# Altium PCB [2] Main.PcbDoc
Units mil, origin at the board's own origin, x right, y up, seen from the top; angles counter-clockwise.
Board outline 3645.67 x 2242.77 mil, 2 copper layers (Top Layer, Bottom Layer); 66 components, 56 nets, 236 pads, 500 vias.
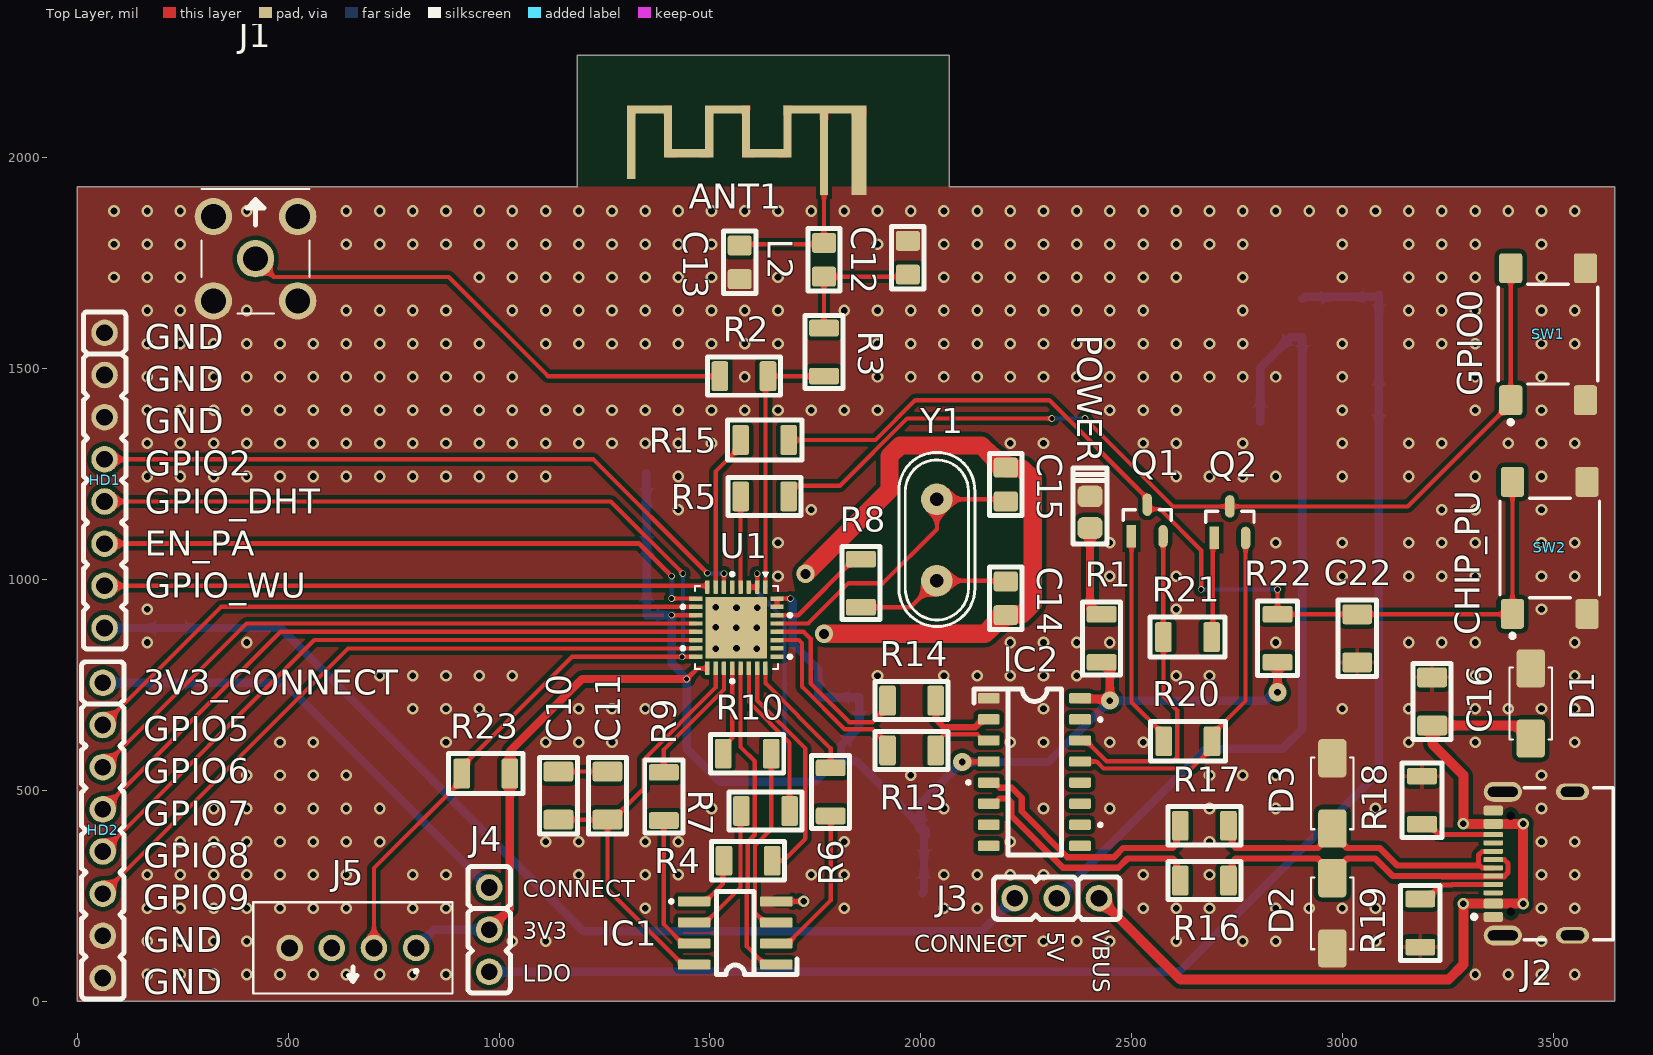
[diagram p0: Top Layer view]
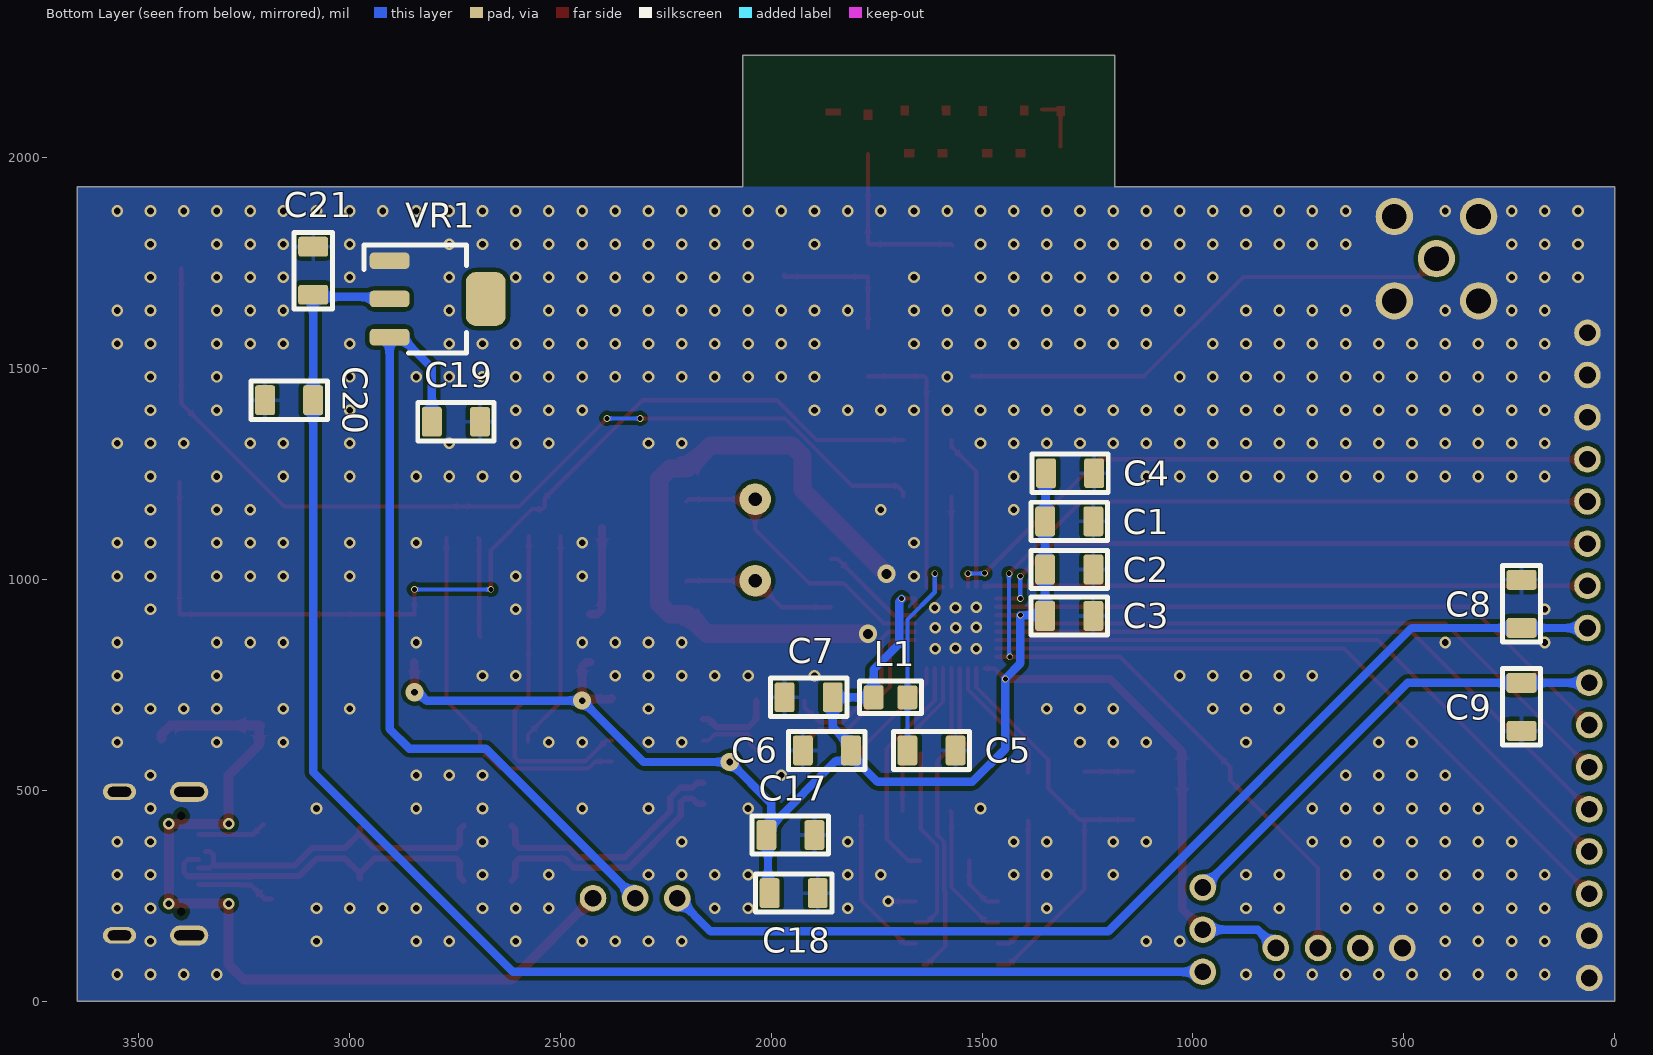
[diagram p1: Bottom Layer view, seen from below]
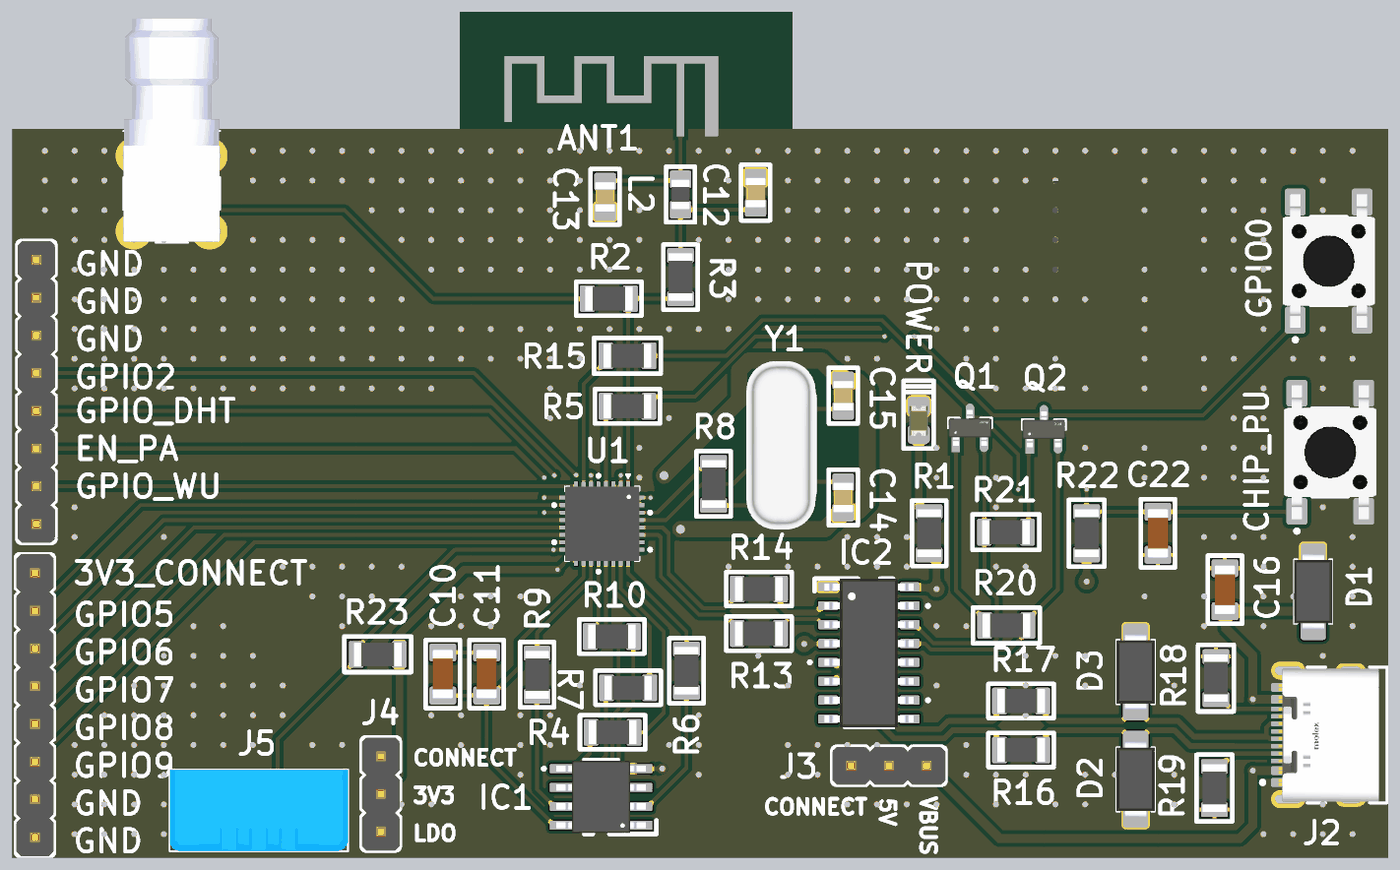
[diagram p2: 3D render of the assembled board from above, using the file's embedded part models]
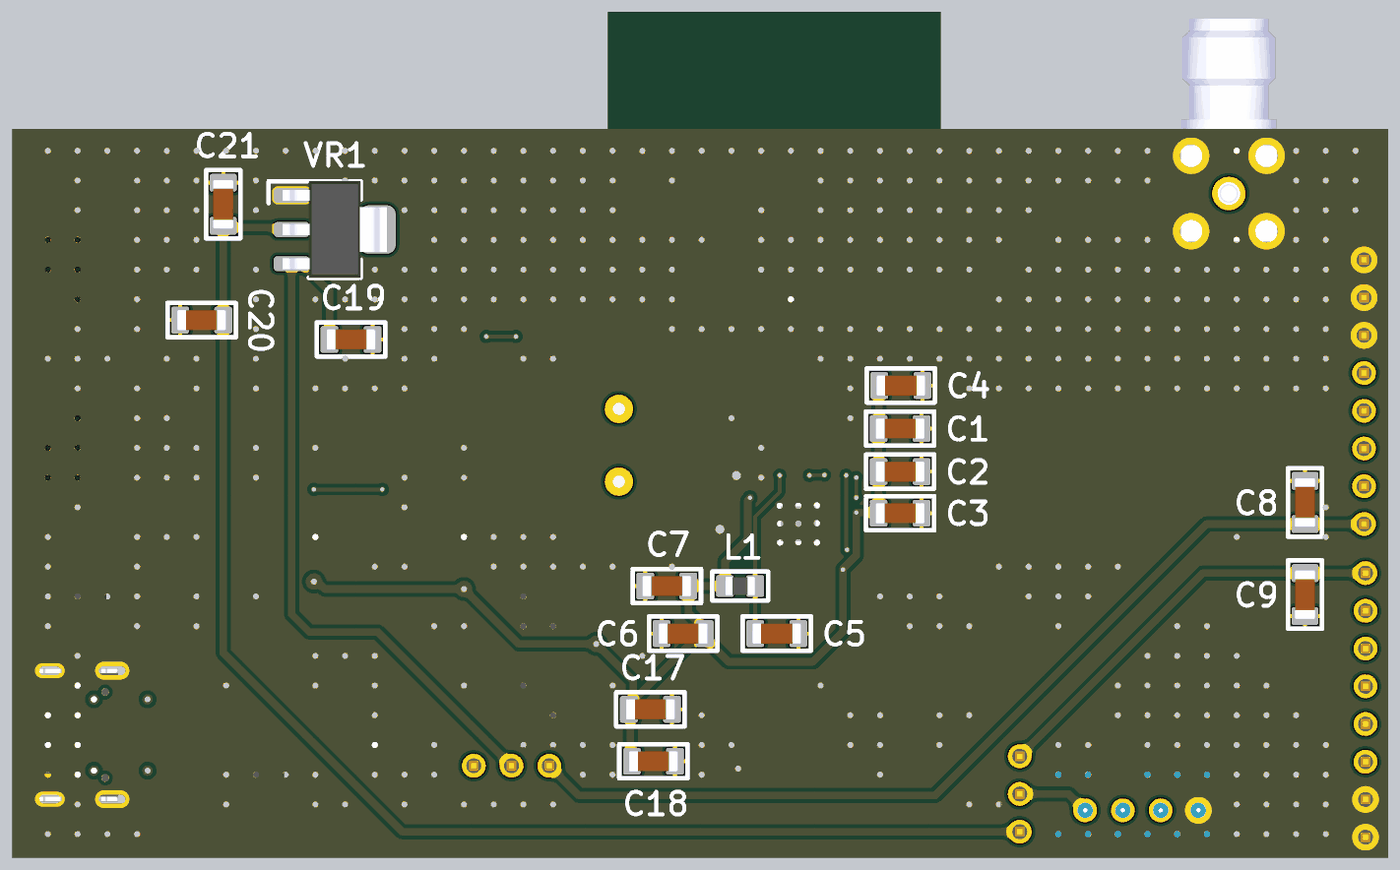
[diagram p3: 3D render of the assembled board from below, using the file's embedded part models]

## Layer stack, top to bottom
Top Solder: solder mask 0.4, Solder Resist, Dk 3.5
Top Layer: signal copper 1.4
Dielectric 1: dielectric 12.6, FR-4, Dk 4.8
Bottom Layer: signal copper 1.4
Bottom Solder: solder mask 0.4, Solder Resist, Dk 3.5

## Board outline
1185.91,2242.77 1185.91,1931.41 0,1931.41 0,0 3645.67,0 3645.67,1931.41 2067.72,1931.41 2067.72,2242.77

## Design rules (kind name [scope] priority, off if disabled: settings)
Clearance [All] p1: gap=10 ignorepadtopadclearanceinfootprint=FALSE
DiffPairsRouting [All] p1: maxlimit=10 minlimit=10 mostfreqgap=10 toplayer_minwidth=15 toplayer_maxwidth=15 toplayer_prefwidth=15 bottomlayer_minwidth=15 bottomlayer_maxwidth=15 bottomlayer_prefwidth=15 maxuncoupledlength=500
PolygonConnect PolygonConnect_1 [All vs IsNamedPolygon('NONET_L-01_P-001') Or IsNamedPolygon('NONET_L-01_P-001')] p1: connectstyle=Direct reliefconductorwidth=10 reliefentries=4 polygonreliefangle="90 Angle" airgapwidth=10
PolygonConnect [All] p2: connectstyle=Relief reliefconductorwidth=10 reliefentries=4 polygonreliefangle="90 Angle" airgapwidth=10
RoutingVias [All] p1: holewidth=15.75 width=27.56 viastyle="Through Hole" minholewidth=11.81 minwidth=15.75 maxholewidth=23.62 maxwidth=43.31
SolderMaskExpansion [All] p1: expansion=4 istentingtop=FALSE
SupplyNets "Schematic Supply Nets_6" [InNet('+3V3_LDO')] p1: voltage=0.000
SupplyNets "Schematic Supply Nets_5" [InNet('+5V_CONNECTOR')] p2: voltage=0.000
SupplyNets "Schematic Supply Nets_4" [InNet('+3V3_CONNECTOR')] p3: voltage=0.000
SupplyNets "Schematic Supply Nets_3" [InNet('+5V_VBUS')] p4: voltage=0.000
SupplyNets "Schematic Supply Nets_2" [InNet('GND')] p5: voltage=0.000
SupplyNets "Schematic Supply Nets_1" [InNet('+5V')] p6: voltage=0.000
SupplyNets "Schematic Supply Nets" [InNet('+3V3')] p7: voltage=0.000
Width [All] p1: maxlimit=3937.01 minlimit=3.94 preferedwidth=21.05 impedanceprofiledriven=TRUE impedanceprofileid={BD9E7770-F0A8-4C08-9988-2C7F983D9492} impedanceprofilevalue=50.000000 minimp=50.000000 maximp=50.000000 favimp=50.000000
29 further rules are at their usual default settings.

## Classes and differential pairs
differential pair class DIFF90: CH340_USB CON_USB USB_D
differential pair CON_USB: +CON_USB_P -CON_USB_N
differential pair CH340_USB: +CH340_USB_P -CH340_USB_N

## Components (designator, comment, footprint, x,y, rotation, side; value= is the part's Value field where it differs from the comment)
ANT1 "ANTENNA" ANT_IFA_USB_2_4GHZ_50R 1853.15,1911.85 r180 top
C1 "10u" 1206_CAP#1 1291.34,1137.8 r0 bottom
C2 "100n" 1206_CAP#1 1291.34,1023.62 r0 bottom
C3 "100n" 1206_CAP#1 1291.34,913.39 r0 bottom
C4 "100n" 1206_CAP#2 1291.34,1251.97 r0 bottom
C5 "1u" 1206_CAP#2 1620.08,594.49 r0 bottom
C6 "100n" 1206_CAP#3 1866.14,594.49 r180 bottom
C7 "10u" 1206_CAP#3 1909.45,720.47 r180 bottom
C8 "100n" 1206_CAP#1 220.47,940 r90 bottom
C9 "100n" 1206_CAP#2 220.47,697.68 r270 bottom
C10 "1u" 1206_CAP#2 1140.75,487.2 r270 top
C11 "100n" 1206_CAP#2 1256.89,487.2 r270 top
C12 "3p3" 0805_CAP 1969.45,1763.15 r270 top
C13 "3p3" 0805_CAP 1570.71,1752.13 r90 top
C14 "15p" 0805_CAP 2201.77,955.2 r90 top
C15 "15p" 0805_CAP 2201.77,1225.08 r270 top
C16 "100n" 1206_CAP#2 3212.91,710.63 r90 top
C17 "10n" 1206_CAP#1 1952.76,393.7 r0 bottom
C18 "100n" 1206_CAP#1 1944.88,255.91 r0 bottom
C19 "4u7, 16V" 1206_CAP#2 2748.03,1374.02 r0 bottom value=4.7uF
C20 "10u" 1206_CAP#2 3143.7,1425.2 r180 bottom
C21 "100n" 1206_CAP#2 3086.61,1732.28 r270 bottom
C22 "1u" 1206_CAP#2 3035.43,860.24 r270 top
D1 "SMAJ5.0A" SMAJ5.0A 3446.85,705.71 r270 top
D2 "SMAJ5.0A" SMAJ5.0A 2976.38,208.07 r90 top
D3 "SMAJ5.0A" SMAJ5.0A 2976.38,492.72 r270 top
HD1 "HD8" Header_8 64.17,1234.88 r270 top
HD2 "HD8" Header_8 60.24,404.76 r270 top
IC1 "W25Q16DVSNIG" W25Q16DVSNIG 1559.06,164.37 r90 top
IC2 "CH340C" CH340C 2269.68,543.11 r270 top
J1 "85_SMA-50-0-144/111_YE" SMA 422.33,1760.77 r180 top
J2 "USB" USB 3492.91,325.67 r90 top (schematic designator j2)
J3 "FTS-103-01-F-S" Header_3 2322.83,244.09 r180 top
J4 "FTS-103-01-F-S" Header_3 976.38,169.29 r270 top
J5 "DHT11" DHT11 653.15,125.98 r180 top
L1 "2.2n" 0805_INDUCTOR 1717.17,720.47 r0 bottom
L2 "2.2n" 0805_INDUCTOR 1770.71,1758.15 r90 top
POWER "LED-0805GVC" "Led 0805G" 2401.57,1159.45 r90 top value=Green (schematic designator LED1)
Q1 "SS8050" SS8050 2537.4,1139.79 r90 top
Q2 "SS8050" SS8050 2733.27,1135.85 r90 top
R1 "1K" RES_0R0_1206#1 2429.13,860.24 r270 top
R2 "0R" RES_0R0_1206#1 1580.71,1482.13 r180 top
R3 "0R" RES_0R0_1206#1 1770.71,1539.22 r90 top
R4 "0R" RES_0R0_1206#1 1590.55,332.68 r0 top
R5 "22R" RES_0R0_1206#1 1629.84,1196.85 r0 top
R6 "0R" RES_0R0_1206#1 1786.42,496.06 r90 top
R7 "0R" RES_0R0_1206#1 1631.89,450.79 r0 top
R8 "22R" RES_0R0_1206#1 1858.27,991.14 r270 top
R9 "0R" RES_0R0_1206#1 1390.75,485.24 r90 top
R10 "0R" RES_0R0_1206#2 1586.61,586.61 r180 top
R13 "499" RES_0R0_1206#1 1978.35,594.49 r0 top
R14 "0R" RES_0R0_1206#1 1978.35,712.6 r0 top
R15 "0R" RES_0R0_1206#1 1629.84,1330.71 r0 top
R16 "0R" RES_0R0_1206#1 2672.91,285.67 r0 top
R17 "0R" RES_0R0_1206#1 2672.91,415.67 r0 top
R18 "5.1K" RES_0R0_1206#1 3188.98,476.38 r270 top
R19 "5.1K" RES_0R0_1206#1 3185.04,185.04 r90 top
R20 "10k" RES_0R0_1206#1 2633.86,616.14 r0 top
R21 "10k" RES_0R0_1206#1 2632.87,863.19 r180 top
R22 "10k" RES_0R0_1206#1 2846.46,860.24 r90 top
R23 "5.1k" RES_0R0_1206#1 968.5,539.37 r0 top
SW1 "GPIO0" "Nut nhan 4 chan" 3487.99,1581.69 r90 top
SW2 "CHIP_PU" "Nut nhan 4 chan" 3492.13,1074.8 r90 top
U1 "ESP32-C3FH4" QFN50P500X500X90-33N 1562.91,885.67 r180 top
VR1 "AMS1117-3V3" "LM1117 3V3" 2791.34,1665.35 r180 bottom
Y1 "16Mhz" "Thach Anh 2 chan cam" 2038.39,1093.5 r270 top value=4Mhz

## Footprints (in the part's own frame and the unit in brackets; to place one, negate y for a bottom-side part, rotate by r counter-clockwise, add the part's x,y. Pads: shape width x height; smd on the part's side, far side on the other; paste and mask are expansions set on the pad)
0805_CAP [mm]
  rrect25% 1.2x1.45 smd: 1(-1.016,0) 2(1.016,0)
  silkscreen extent -1.88,-0.97 1.88,0.97, body extent -1,-0.67 1,0.67, height 1.22
0805_INDUCTOR [mm]
  rrect25% 1.2x1.45 smd: 1(-1.016,0) 2(1.016,0)
  silkscreen extent -1.88,-0.97 1.88,0.97, body extent -1,-0.63 1,0.63, height 1
1206_CAP#1 [mm]
  rrect25% 1.2x1.8 smd mask+0.1: 1(-1.4,0) 2(1.5,0)
  silkscreen extent -2.25,-1.15 2.35,1.15, body extent -1.6,-0.7 1.7,0.7, height 1.57
1206_CAP#2 [mm]
  rrect25% 1.2x1.8 smd mask+0.1: 1(-1.45,0) 2(1.45,0)
  silkscreen extent -2.3,-1.15 2.3,1.15, body extent -1.65,-0.7 1.65,0.7, height 1.57
1206_CAP#3 [mm]
  rrect25% 1.2x1.8 smd mask+0.1: 1(-1.5,0) 2(1.4,0)
  silkscreen extent -2.35,-1.15 2.25,1.15, body extent -1.7,-0.7 1.6,0.7, height 1.57
ANT_IFA_USB_2_4GHZ_50R [mm]
  rect 5x0.5 smd paste+0 mask+0: 1(2.05,-5.15)
  rect 0.5x4.9 smd paste+0 mask+0: 1(2.1,-2.45)
  rect 0.5x2.64 smd paste+0 mask+0: 1(4.3,-3.58) 1(6.8,-3.58) 1(9,-3.58) 1(11.5,-3.58)
  rect 2x0.5 smd paste+0 mask+0: 1(5.55,-2.51) 1(10.25,-2.51)
  rect 2.7x0.5 smd paste+0 mask+0: 1(7.9,-5.15) 1(12.6,-5.15)
  rect 0.5x3.94 smd paste+0 mask+0: 1(13.7,-2.93)
  rect 0.9x4.9 smd paste+0 mask+0: 2(0,-2.45)
CH340C [mm]
  rrect25% 0.62x1.31 smd: 1(-4.445,-2.75) 2(-3.175,-2.75) 3(-1.905,-2.75) 4(-0.635,-2.75) 5(0.635,-2.75) 6(1.905,-2.75) 7(3.175,-2.75) 8(4.445,-2.75) 9(4.445,2.75) 10(3.175,2.75) 11(1.905,2.75) 12(0.635,2.75) 13(-0.635,2.75) 14(-1.905,2.75) 15(-3.175,2.75) 16(-4.445,2.75)
  silkscreen extent -5,-4.07 5,4.08, body extent -5,-3 5,3, height 1.8
DHT11 [mm]
  round 1.6 hole 1.016: 1(-3.81,0) 2(-1.27,0) 3(1.27,0) 4(3.81,0)
  silkscreen extent -6,-2.75 6,2.75, body extent -6,-2.75 6,2.75, height 16
Header_3 [mm] "Connector DIP, 3Pin_2.54mm"
  round 1.6 hole 1 mask+0.1: 1(-2.54,0) 2(0,0) 3(2.54,0)
  silkscreen extent -3.81,-1.28 3.81,1.28, body extent -3.81,-1.27 3.81,1.27, height 10.1
Header_8 [mm] "Connector DIP Male, 8Pin_2.54mm"
  round 1.6 hole 1 mask+0.1: 1(-8.89,0) 2(-6.35,0) 3(-3.81,0) 4(-1.27,0) 5(1.27,0) 6(3.81,0) 7(6.35,0) 8(8.89,0)
  silkscreen extent -10.16,-1.28 10.16,1.28, body extent -10.16,-1.27 10.16,1.27, height 10.1
"Led 0805G" [mm] "Chip LED; Green; Body 2.0 x 1.3 mm (LxW typ)"
  rrect50% 1.3x1.5 smd: 1(-0.95,0) 2(0.95,0)
  silkscreen extent -1.91,-1.02 2.67,1.02, body extent -1.04,-0.62 0.98,0.62, height 1.1
"LM1117 3V3" [mm]
  rrect50% 2.4x1 smd: 1(-2.9,2.3) 2(-2.9,0) 3(-2.9,-2.3)
  rrect50% 2.4x3.25 smd: 4(2.9,0)
  silkscreen extent -4.44,-3.25 1.75,3.25, body extent -3.5,-3.25 3.5,3.25, height 1.8
"Nut nhan 4 chan" [mm]
  rrect25% 1.8x1.4 smd paste+0 mask+0: 1(-3.975,2.25) 2(3.975,2.25) 3(-3.975,-2.25) 4(3.975,-2.25)
  silkscreen extent -5.42,-3 3,3, body extent -4.5,-3 4.5,3, height 4.3
QFN50P500X500X90-33N [mm]
  rrect25% 0.27x0.81 smd mask+0: 1(-1.75,-2.445) 2(-1.25,-2.445) 3(-0.75,-2.445) 4(-0.25,-2.445) 5(0.25,-2.445) 6(0.75,-2.445) 7(1.25,-2.445) 8(1.75,-2.445) 17(1.75,2.445) 18(1.25,2.445) 19(0.75,2.445) 20(0.25,2.445) 21(-0.25,2.445) 22(-0.75,2.445) 23(-1.25,2.445) 24(-1.75,2.445)
  rrect25% 0.81x0.27 smd mask+0: 9(2.445,-1.75) 10(2.445,-1.25) 11(2.445,-0.75) 12(2.445,-0.25) 13(2.445,0.25) 14(2.445,0.75) 15(2.445,1.25) 16(2.445,1.75) 25(-2.445,1.75) 26(-2.445,1.25) 27(-2.445,0.75) 28(-2.445,0.25) 29(-2.445,-0.25) 30(-2.445,-0.75) 31(-2.445,-1.25) 32(-2.445,-1.75)
  rect 3.7x3.7 smd paste-0.68 mask+0.05: 33(0,0)
  silkscreen extent -3.32,-3.33 3.32,3.32, body extent -2.5,-2.5 2.5,2.5, height 0.9
RES_0R0_1206#1 [mm]
  rrect25% 1x1.8 smd mask+0.1: 1(-1.45,0) 2(1.45,0)
  silkscreen extent -2.2,-1.15 2.2,1.15, body extent -1.6,-0.8 1.6,0.8, height 0.6
RES_0R0_1206#2 [mm]
  rrect25% 1x1.8 smd mask+0.1: 1(-1.5,0) 2(1.4,0)
  silkscreen extent -2.25,-1.15 2.15,1.15, body extent -1.65,-0.8 1.55,0.8, height 0.6
SMA [mm]
  round 2.25 hole 1.5: 1(0,0) G1(-2.54,2.54) G2(2.54,2.54) G3(-2.54,-2.54) G4(2.54,-2.54)
  silkscreen extent -3.25,-4.21 3.25,3.3, body extent -3.22,-11.77 3.22,3.23, height 9.65
SMAJ5.0A [mm]
  rrect25% 2.3x1.7 smd: 1(-2.115,0) 2(2.115,0)
  silkscreen extent -2.16,-1.28 2.16,1.28, body extent -2.54,-1.29 2.54,1.29, height 2.65
SS8050 [mm]
  rect 1.357x0.572 smd paste+0 mask+0: 1(-0.951,0.95)
  rrect100% 1.357x0.572 smd paste+0 mask+0: 2(-0.951,-0.95) 3(0.951,0)
  silkscreen extent 0,-1.45 0.65,1.45, body extent -1.88,-1.7 1.88,1.7, height 0.25
"Thach Anh 2 chan cam" [mm]
  round 1.905 hole 0.8: 1(-2.45,0) 2(2.45,0)
  silkscreen extent -5.28,-2.29 5.21,2.29, body extent -5.68,-2.36 5.68,2.29, height 3.5
USB [mm]
  rrect50% 0.6x1.2 smd paste+0 mask+0: A1B12(-3.2,3.425) A4B9(-2.4,3.425) B1A12(3.2,3.425) B4A9(2.4,3.425)
  rrect50% 0.3x1.2 smd paste+0 mask+0: A5(-1.25,3.425) A6(-0.25,3.425) A7(0.25,3.425) A8(1.25,3.425) B5(1.75,3.425) B6(0.75,3.425) B7(-0.75,3.425) B8(-1.75,3.425)
  rrect100% 1x2 hole 1.4 slot 0.6 at 0 deg paste-2539.97 mask+0: S1(-4.32,-1.35) S2(4.33,-1.35)
  rrect100% 1.2x2.3 hole 1.8 slot 0.6 at 0 deg paste-2539.97 mask+0: S3(-4.32,2.85) S4(4.33,2.85)
  round 0 hole 0.5 paste-2539.97 mask+0: ""(-2.89,2.375)
  rrect100% 0x0 hole 0.5 paste-2539.97 mask+0: ""(2.89,2.375)
  silkscreen extent -4.57,-3.8 4.57,4.7, body extent -4.47,-3.25 4.47,3.5, height 3.36
W25Q16DVSNIG [mm]
  rrect25% 0.6x1.97 smd: 1(-1.98,-2.5) 2(-0.71,-2.5) 3(0.56,-2.5) 4(1.83,-2.5) 5(1.83,2.45) 6(0.56,2.45) 7(-0.71,2.45) 8(-1.98,2.45)
  silkscreen extent -2.58,-3.75 2.42,3.92, body extent -2.5,-3.03 2.35,2.97, height 1.75

## Part data
C1 C2 C3 C4 C5 C6 C7 C8 C9 C10 C11 C16 C17 C18 C20 C21 C22: library part CAP_1206
C12 C13 C14 C15: library part CAP_0805
C19: library part CL05A475MO5NUNC, "CAP CER 4.7UF 16V X5R 0402", Capacitor Type=Ceramic, Case/Package=0402, LCSC Part Number=C318563, Manufacturer=Samsung, Max Operating Temperature=85°C, Min Operating Temperature=-55°C, Package Shape=Rectangular, Package Style=SMTMeter, Rated DC Voltage (URdc)=16V, Supplier Part Number=1276-6836-1-ND, Temperature Characteristics Code=X5R, Tolerance  (fill in as +-)=20%, Category="Ceramic Capacitors", ComponentLink1Description=https://datasheet.ciiva.com:443/pdfs/VipMasterIC/IC/SEMS/SEMS-S-A0008384515/SEMS-S-A0008898881-1.pdf?src-supplier=IHS+Markit, ComponentLink1URL=https://datasheet.ciiva.com:443/pdfs/VipMasterIC/IC/SEMS/SEMS-S-A0008384515/SEMS-S-A0008898881-1.pdf?src-supplier=IHS+Markit, ComponentLink2Description=http://www.farnell.com/datasheets/2710653.pdf?src-supplier=Farnell, ComponentLink2URL=http://www.farnell.com/datasheets/2710653.pdf?src-supplier=Farnell, ComponentLink3Description=http://www.samsungsem.com/kr/support/product-search/mlcc/CL05A475MO5NUNC.jsp?src-supplier=Digikey, ComponentLink3URL=http://www.samsungsem.com/kr/support/product-search/mlcc/CL05A475MO5NUNC.jsp?src-supplier=Digikey, ComponentLink4Description=http://www.farnell.com/datasheets/2710653.pdf?src-supplier=Newark, ComponentLink4URL=http://www.farnell.com/datasheets/2710653.pdf?src-supplier=Newark, ComponentLink5Description=http://www.farnell.com/datasheets/2710653.pdf?src-supplier=Element14, ComponentLink5URL=http://www.farnell.com/datasheets/2710653.pdf?src-supplier=Element14, ComponentLink6Description=https://datasheet.octopart.com/CL05A475MO5NUNC-Samsung-Electro-Mechanics-datasheet-123102911.pdf?src-supplier=Future+Electronics, ComponentLink6URL=https://datasheet.octopart.com/CL05A475MO5NUNC-Samsung-Electro-Mechanics-datasheet-123102911.pdf?src-supplier=Future+Electronics, Dielectric Material=Ceramic, Height=0.7mm, JESD-609 Code=e3, Length=1mm, Manufacturer Part Number=CL05A475MO5NUNC, Mounting Technology="Surface Mount", Multilayer=Yes, Packaging="Tape and Reel", Pins=2, Pricing="1=0.44, 10=0.293, 50=0.216, 100=0.1759, 500=0.13888, 1000=0.11727, 2500=0.1111, 5000=0.10493 (USD)", Reach SVHC Compliant=Yes, RoHS=Yes, RoHS Compliant=Yes, Stock=647617, Supplier=Digikey, Terminal Finish=Nickel, Termination=Wraparound, Tolerance (fill in as +-)=20%, Width=0.5mm
D1 D2: library part AQ3045-01ETG, "TVS DIODE 5.3VWM 12VC SOD882", LCSC Part Number=C3710326, Manufacturer=Littelfuse, Max Breakdown Voltage=9V, Max Operating Temperature=150°C, Min Breakdown Voltage=6.8V, Min Operating Temperature=-55°C, Non-rep Peak Rev Power Dis-Max=40W, Package Body Material=Plastic, Package Shape=Rectangular, Package Style="CHIP CARRIERMeter", Rep Pk Reverse Voltage-Max=5.3V, Supplier Part Number=F9321CT-ND, Category="TVS Diodes", ComponentLink1Description=https://datasheet.ciiva.com:443/pdfs/VipMasterIC/IC/LFSI/LFSI-S-A0007892042/LFSI-S-A0007892042-1.pdf?src-supplier=IHS+Markit, ComponentLink1URL=https://datasheet.ciiva.com:443/pdfs/VipMasterIC/IC/LFSI/LFSI-S-A0007892042/LFSI-S-A0007892042-1.pdf?src-supplier=IHS+Markit, ComponentLink2Description=https://www.littelfuse.com/~/media/electronics/datasheets/tvs_diode_arrays/littelfuse_tvs_diode_array_aq3045_datasheet.pdf.pdf?src-supplier=Digikey, ComponentLink2URL=https://www.littelfuse.com/~/media/electronics/datasheets/tvs_diode_arrays/littelfuse_tvs_diode_array_aq3045_datasheet.pdf.pdf?src-supplier=Digikey, ComponentLink3Description=http://www.littelfuse.com/~/media/electronics/datasheets/tvs_diode_arrays/littelfuse_tvs_diode_array_aq3045_datasheet.pdf.pdf?src-supplier=Digikey, ComponentLink3URL=http://www.littelfuse.com/~/media/electronics/datasheets/tvs_diode_arrays/littelfuse_tvs_diode_array_aq3045_datasheet.pdf.pdf?src-supplier=Digikey, Diode Element Material=SILICON, Diode Type="TRANS VOLTAGE SUPPRESSOR", Manufacturer Part Number=AQ3045-01ETG, Number of Elements=1, Pins=2, Polarity=Bidirectional, Pricing="1=0.5, 10=0.391, 100=0.2344, 500=0.217, 1000=0.14756, 2000=0.13585, 5000=0.1302 (USD)", Reach SVHC Compliant=Yes, Reference Standard=AEC-Q101, RoHS=Yes, RoHS Compliant=Yes, Stock=21664, Supplier=Digikey, Surface Mount=Yes, Technology=AVALANCHE, Terminal Form="No Lead", Terminal Position=BOTTOM
D3: library part AQ3045-01ETG, "TVS DIODE", LCSC Part Number=C3710326, Manufacturer=Littelfuse, Max Breakdown Voltage=9V, Max Operating Temperature=150°C, Min Breakdown Voltage=6.8V, Min Operating Temperature=-55°C, Non-rep Peak Rev Power Dis-Max=40W, Package Body Material=Plastic, Package Shape=Rectangular, Package Style="CHIP CARRIERMeter", Rep Pk Reverse Voltage-Max=5.3V, Supplier Part Number=F9321CT-ND, Category="TVS Diodes", ComponentLink1Description=https://datasheet.ciiva.com:443/pdfs/VipMasterIC/IC/LFSI/LFSI-S-A0007892042/LFSI-S-A0007892042-1.pdf?src-supplier=IHS+Markit, ComponentLink1URL=https://datasheet.ciiva.com:443/pdfs/VipMasterIC/IC/LFSI/LFSI-S-A0007892042/LFSI-S-A0007892042-1.pdf?src-supplier=IHS+Markit, ComponentLink2Description=https://www.littelfuse.com/~/media/electronics/datasheets/tvs_diode_arrays/littelfuse_tvs_diode_array_aq3045_datasheet.pdf.pdf?src-supplier=Digikey, ComponentLink2URL=https://www.littelfuse.com/~/media/electronics/datasheets/tvs_diode_arrays/littelfuse_tvs_diode_array_aq3045_datasheet.pdf.pdf?src-supplier=Digikey, ComponentLink3Description=http://www.littelfuse.com/~/media/electronics/datasheets/tvs_diode_arrays/littelfuse_tvs_diode_array_aq3045_datasheet.pdf.pdf?src-supplier=Digikey, ComponentLink3URL=http://www.littelfuse.com/~/media/electronics/datasheets/tvs_diode_arrays/littelfuse_tvs_diode_array_aq3045_datasheet.pdf.pdf?src-supplier=Digikey, Diode Element Material=SILICON, Diode Type="TRANS VOLTAGE SUPPRESSOR", Manufacturer Part Number=AQ3045-01ETG, Number of Elements=1, Pins=2, Polarity=Bidirectional, Pricing="1=0.5, 10=0.391, 100=0.2344, 500=0.217, 1000=0.14756, 2000=0.13585, 5000=0.1302 (USD)", Reach SVHC Compliant=Yes, Reference Standard=AEC-Q101, RoHS=Yes, RoHS Compliant=Yes, Stock=21664, Supplier=Digikey, Surface Mount=Yes, Technology=AVALANCHE, Terminal Form="No Lead", Terminal Position=BOTTOM
HD1 HD2: library part Header8, "Header 8", Creat by=VanDungEvn@Gmail.com
J1: "RF Connectors / Coaxial Connectors, Right Angle Pcb Jack", Package=None, Check_prices=https://www.snapeda.com/parts/85_SMA-50-0-144/111_YE/Huber%252BSuhner/view-part/?ref=eda, MF=HUBER+SUHNER, MP=85_SMA-50-0-144/111_YE, SnapEDA_Link=https://www.snapeda.com/parts/85_SMA-50-0-144/111_YE/Huber%252BSuhner/view-part/?ref=snap
J3 J4: "CONN HEADER VERT 3POS 1.27MM", Flammability Rating="UL94 V-0", LCSC Part Number=C3333578, Manufacturer=Samtec, Manufacturer Series=FTS, Supplier Part Number=612-FTS-103-01-F-S-ND, Additional Feature="Low Profile", Category=Connectors, ComponentLink1Description=https://datasheet.ciiva.com:443/pdfs/VipMasterIC/IC/SAMI/SAMI-S-A0001504673/SAMI-S-A0001504673-1.pdf?src-supplier=IHS+Markit, ComponentLink1URL=https://datasheet.ciiva.com:443/pdfs/VipMasterIC/IC/SAMI/SAMI-S-A0001504673/SAMI-S-A0001504673-1.pdf?src-supplier=IHS+Markit, ComponentLink2Description=http://suddendocs.samtec.com/prints/fts-1xx-xx-xx-xx-xx-mkt.pdf?src-supplier=Digikey, ComponentLink2URL=http://suddendocs.samtec.com/prints/fts-1xx-xx-xx-xx-xx-mkt.pdf?src-supplier=Digikey, ComponentLink3Description=http://www.samtec.com/documents/webfiles/pdf/FTS.pdf?src-supplier=Avnet, ComponentLink3URL=http://www.samtec.com/documents/webfiles/pdf/FTS.pdf?src-supplier=Avnet, ComponentLink4Description=https://datasheet.octopart.com/FTS-103-01-F-S-Samtec-datasheet-116535195.pdf?src-supplier=Toby+Electronics, ComponentLink4URL=https://datasheet.octopart.com/FTS-103-01-F-S-Samtec-datasheet-116535195.pdf?src-supplier=Toby+Electronics, ComponentLink5Description=https://datasheet.octopart.com/FTS-103-01-F-S-Samtec-datasheet-151470456.pdf?src-supplier=Sager+Electronics, ComponentLink5URL=https://datasheet.octopart.com/FTS-103-01-F-S-Samtec-datasheet-151470456.pdf?src-supplier=Sager+Electronics, Connector Type="BOARD CONNECTOR", Contact Finish - Mating="GOLD (3) OVER NICKEL (50)", Contact Finish - Termination="Matte Tin (Sn) - with Nickel (Ni) barrier", Contact Gender=Male, Contact Material=Bronze, DIN Conformance=No, Filter Feature=No, IEC Conformance=No, JESD-609 Code=e3, Manufacturer Part Number=FTS-103-01-F-S, MIL Conformance=No, Mixed Contacts=No, Mounting Style=STRAIGHT, Mounting Technology=Board, Number of Contacts=3, Number of Rows Loaded=1, Option="General Purpose", Pricing="1=1.2, 10=1.015, 100=0.911, 1000=0.66256, 5000=0.57974, 10000=0.55075 (USD)", Reach SVHC Compliant=Yes, RoHS=Yes, RoHS Compliant=Yes, Stock=3910, Supplier=Digikey, Terminal Pitch=1.27mm, Termination=Solder
J5: library part DHT22, "Capacitive-type humidity and temperature module/sensor", Package=Package, Check_prices=https://www.snapeda.com/parts/DHT22/Aosong+Electronics/view-part/?ref=eda, MF="Aosong Electronics", MP=DHT22, SnapEDA_Link=https://www.snapeda.com/parts/DHT22/Aosong+Electronics/view-part/?ref=snap
L1 L2: library part Inductor_0805, Package=Package, Check_prices=https://www.snapeda.com/parts/ASMPH-0805-1R0M-T/Abracon/view-part/?ref=eda, MF=Abracon, MP=ASMPH-0805-1R0M-T, SnapEDA_Link=https://www.snapeda.com/parts/ASMPH-0805-1R0M-T/Abracon/view-part/?ref=snap
POWER: "LED Green 2mA 3V 0805", ComponentLink1Description=Datasheet, ComponentLink1URL="D:\Dropbox\Datasheets\Opto and Illumination\LEDs\SMD LED.pdf", Unit Price=0.0476
Q1 Q2: library part SS8050-G, "TRANS NPN 25V 1.5A SOT23-3", LCSC Part Number=C164886, Manufacturer=Comchip, Supplier Part Number=641-1790-1-ND, Category=Transistors, ComponentLink1Description=https://datasheet.ciiva.com:443/pdfs/VipMasterIC/IC/COMC/COMC-S-A0004994192/COMC-S-A0004994192-1.pdf?src-supplier=IHS+Markit, ComponentLink1URL=https://datasheet.ciiva.com:443/pdfs/VipMasterIC/IC/COMC/COMC-S-A0004994192/COMC-S-A0004994192-1.pdf?src-supplier=IHS+Markit, ComponentLink2Description="http://www.comchiptech.com/admin/files/product/SS8050-G RevA181526.pdf?src-supplier=Digikey", ComponentLink2URL="http://www.comchiptech.com/admin/files/product/SS8050-G RevA181526.pdf?src-supplier=Digikey", Manufacturer Part Number=SS8050-G, Pricing="1=0.29, 10=0.2, 100=0.0978, 500=0.08154, 1000=0.05666 (USD)", Reach SVHC Compliant=Yes, RoHS=Yes, RoHS Compliant=Yes, Stock=108568, Supplier=Digikey
R1 R2 R3 R4 R5 R6 R7 R8 R9 R10 R13 R14 R15 R16 R17 R18 R19 R20 R21 R22 R23: library part RES_1206
SW1 SW2: library part PTS645SH50SMTR92LFS, "SWITCH TACTILE SPST-NO 0.05A 12V", Contact Current(DC)-Max=50mA, Contact DC Max Rating R Load=0.05A@12VDC, Contact Resistance=0.1mR, Contact Voltage(DC)-Max=12V, Dielectric Withstand Volts=250VACV, Insulation Resistance=100GR, LCSC Part Number=C221869, Manufacturer="ITT C&K", Manufacturer Series=PTS645, Max Operating Temperature=60°C, Min Operating Temperature=-20°C, Supplier Part Number=CKN9085CT-ND, Actuator Type=Pushbutton, Body Breadth=5.9944inch, Body Height=3.4544mm, Body Length or Diameter=5.9944mm, Category="Tactile Switches", ComponentLink1Description=https://datasheet.ciiva.com:443/pdfs/VipMasterIC/IC/CKCI/CKCI-S-A0001796527/CKCI-S-A0001796842-1.pdf?src-supplier=IHS+Markit, ComponentLink1URL=https://datasheet.ciiva.com:443/pdfs/VipMasterIC/IC/CKCI/CKCI-S-A0001796527/CKCI-S-A0001796842-1.pdf?src-supplier=IHS+Markit, ComponentLink2Description=https://datasheet.ciiva.com/29903/getdatasheetpartid-773702-29903807.pdf?src-supplier=Verical, ComponentLink2URL=https://datasheet.ciiva.com/29903/getdatasheetpartid-773702-29903807.pdf?src-supplier=Verical, ComponentLink3Description=https://datasheet.ciiva.com/14920/pts645-14920741.pdf?src-supplier=Digikey, ComponentLink3URL=https://datasheet.ciiva.com/14920/pts645-14920741.pdf?src-supplier=Digikey, ComponentLink4Description=https://datasheet.ciiva.com/22637/1707731-22637356.pdf?src-supplier=Element14, ComponentLink4URL=https://datasheet.ciiva.com/22637/1707731-22637356.pdf?src-supplier=Element14, Electrical Life=100000Cycles, JESD-609 Code=e4, Manufacturer Part Number=PTS645SH50SMTR92LFS, Mounting Technology="Surface Mount", PCB Hole Count=4, Pricing="1=0.35, 10=0.337, 25=0.3172, 100=0.2753, 250=0.24972, 500=0.2323 (USD)", Reach SVHC Compliant=Yes, RoHS=Yes, RoHS Compliant=Yes, Stock=64637, Supplier=Digikey, Switch Action=MOMENTARY, Switch Function=SPST, Switch Type=Keypad, Terminal Finish=Silver, Terminal Length=0.138inch, Termination=Solder
U1: Package=None, Availability=Unavailable, MP=ESP32-C3FH4, Price=None
VR1: library part LM1117IMP-3.3/NOPB, "linear voltage regulator", Package="SOT-223-4 Texas Instruments", Check_prices=https://www.snapeda.com/parts/LM1117IMP-3.3/NOPB/Texas+Instruments/view-part/?ref=eda, MF="Texas Instruments", MP=LM1117IMP-3.3/NOPB, SnapEDA_Link=https://www.snapeda.com/parts/LM1117IMP-3.3/NOPB/Texas+Instruments/view-part/?ref=snap
Y1: library part "Thach Anh 2 chan Cam", "Crystal For all Crystal 2pin."

## Via types
v1: diameter 27.56, hole 15.75, Top Layer to Bottom Layer, tented both sides, 481 vias
v2: diameter 15.75, hole 11.81, Top Layer to Bottom Layer, tented both sides, 14 vias
v3: diameter 43.31, hole 15.75, Top Layer to Bottom Layer, tented both sides, 3 vias
v4: diameter 43.31, hole 23.62, Top Layer to Bottom Layer, tented both sides, 2 vias

## Nets (pads, with @x,y where several pads share a name; then routed paths per layer and width w, separated by ;. In a path a pad name is that pad's centre, name@x,y a point inside that pad or via, vN(x,y) a via of type N, cw(c..) or ccw(c..) an arc to the next point about the centre after c; other vN are vias at no path point)
+3V3: C1.2 C2.2 C3.2 C4.2 C6.2 C7.2 C17.2 C18.2 IC2.4 IC2.16 J4.2 J5.1 L1.2 R1.2 R22.1 R23.2 U1.11 U1.17 U1.31 U1.32 | length 4747.1
  Top Layer w10: v2(1409.45,915.2) U1.11 ; v2(1444.88,763.78) 1470.08,788.98 U1.17@1493.7,788.98 ; U1.31@1659.08,934.79 U1.31 1659.27,934.98 U1.32@1659.27,954.57 ; U1.32@1659.08,954.66 U1.32 U1.32@1659.27,954.57 ; v2@1690.85,954.47 1690.76,954.57 U1.32@1659.27,954.57 ; v3(2098.43,566.93) 2099.02,567.52 2160.83,567.52 IC2.4
  Top Layer w20: J4.2 1025.59,218.5 R23.2 1026.16,539.94 1026.16,593.09 1196.85,763.78 v2(1444.88,763.78) ; IC2.16 2380.16,715.91 v3@2445.51,715.91 ; R1.2 2439.13,803.15 2448.82,793.46 2448.82,719.21 v3@2445.51,715.91 ; v3(2448.82,712.6) v3@2445.51,715.91 ; v3(2846.46,732.28) R22.1
  Bottom Layer w20: J5.1 846.46,169.29 J4.2@976.02,169.29 ; C4.2 1349.41,1250.98 1349.41,1138.78 C1.2 C2.2 C3.2 1352.2,915.2 v2(1409.45,915.2) 1409.45,800.77 1444.88,765.33 1444.88,598.43 1523.62,519.68 1748.03,519.68 C6.2@1811.02,582.68 ; v2(1690.94,954.57) 1690.94,953.01 1696.85,947.11 1696.85,846.46 1757.17,786.14 L1.2 C7.2 1854.33,649.61 1811.02,606.3 C6.2 ; C18.2 2007.87,259.84 2007.87,389.76 C17.2 ; v3(2846.46,732.28) 2837.44,732.28 2817.76,712.6 v3(2448.82,712.6) 2303.15,566.93 v3(2098.43,566.93) 2000,468.5 2000,405.51 C17.2 ; C6.2@1811.02,582.68 C6.2 ; C6.2@1811.02,582.68 1824.65,569.06 1847.47,569.06 1997.39,419.13 1998.19,419.13 2005.91,411.42 2011.81,405.51 C17.2 ; C6.2@1811.02,582.68 C6.2
+3V3_CONNECTOR: C9.1 HD2.1 J4.1 | length 1117.2
  Bottom Layer w20: HD2.1 C9.1 490.91,754.76 J4.1
+3V3_LDO: C20.2 C21.2 J4.3 VR1.2 | length 3623.6
  Bottom Layer w20: J4.3 2612.6,69.29 3086.61,543.31 C20.2 C21.2 3081.69,1670.28 2910.43,1670.28 VR1.2
+5V: C19.2 J3.2 VR1.3 | length 1936.7
  Bottom Layer w20: J3.2 2677.17,598.43 2858.27,598.43 2905.51,645.67 VR1.3 2877.95,1574.8 2805.12,1501.97 C19.2
+5V_CONNECTOR: C8.1 HD1.8 J3.3 | length 2489.3
  Bottom Layer w20: HD1.8 C8.1 481.26,884.88 1200.79,165.35 2144.09,165.35 J3.3
+5V_VBUS: C16.1 D1.2 J2.A4B9 J2.B4A9 J3.1 | length 2093.2
  Top Layer w23.62: J3.1 2615.75,51.18 3251.97,51.18 3287.01,86.22 v1(3287.01,231.18) J2.A4B9 v1(3429.13,231.18) v1(3429.13,420.16) J2.B4A9 v1(3287.01,420.16) 3287.01,535.83 3214.51,608.33 3214.51,651.95 C16.1 3425.2,653.54 3446.85,631.89 D1.2
BTN_GPIO0: Q2.3 R5.2 SW1.1 SW1.2 | length 2303.8
  Top Layer w10: R5.2 1686.93,1207.68 1701.61,1222.36 1808.41,1222.36 1967.93,1381.89 v2(2311.02,1381.89) ; v2(2389.76,1381.89) 2598.38,1173.27 Q2.3 3155.36,1173.27 3399.41,1417.32 SW1.1 SW1.2
  Bottom Layer w10: v2(2311.02,1381.89) v2(2389.76,1381.89)
CH340_USB_N: IC2.6 R16.1 | length 597.7
  Top Layer w15: IC2.6 2175,468.11 2187.5,480.61 2205.63,480.61 2214.42,471.82 2214.42,439.58 2337.59,316.41 2468.86,316.41 2490.62,338.17 2598.21,338.17 2607,329.38 2607,294.5 R16.1
CH340_USB_P: IC2.5 R17.1 | length 597.7
  Top Layer w15: IC2.5 2175,518.11 2187.5,505.61 2215.98,505.61 2239.42,482.18 2239.42,449.94 2347.95,341.41 2458.5,341.41 2480.27,363.17 2598.21,363.17 2607,371.96 2607,406.84 R17.1
CHIP_PU: C22.1 Q1.3 R15.2 R22.2 SW2.1 SW2.2 | length 2380.1
  Top Layer w10: R15.2 1892.71,1330.71 1987.2,1425.2 2304.87,1425.2 2537.4,1192.66 Q1.3 2537.4,1172.54 2543.19,1166.76 2567.52,1166.76 2665.35,1068.92 v2(2665.35,976.38) ; v2(2846.46,976.38) R22.2 C22.1 3402.56,917.32 SW2.1 SW2.2
  Bottom Layer w10: v2(2665.35,976.38) v2(2846.46,976.38)
CON_USB_N: D2.2 J2.A7 J2.B7 R16.2 | length 837.5
  Top Layer w11.81: J2.A7 3384.34,335.51 3393.13,326.72 3393.13,304.95 3384.34,296.16 J2.B7@3374.19,296.16
  Top Layer w15: R16.2 2738.83,294.5 2738.83,329.38 2747.62,338.17 2855.2,338.17 2855.47,337.89 2941.63,337.89 D2.2@2976.38,303.14 ; D2.2 D2.2@2976.38,303.14 ; 3237.07,296.14 J2.B7 3384.34,296.14 ; 3237.07,296.39 3120.24,296.39 3078.74,337.89 3011.13,337.89 D2.2@2976.38,303.14
CON_USB_P: D3.2 J2.A6 J2.B6 R17.2 | length 775.8
  Top Layer w11.81: J2.B6@3341.95,355.17 3331.8,355.17 3323.01,346.39 3323.01,324.61 3331.8,315.83 J2.A6
  Top Layer w15: R17.2 2738.83,406.84 2738.83,371.96 2747.62,363.17 2865.55,363.17 2865.83,362.89 2941.63,362.89 D3.2@2976.38,397.65 ; D3.2 D3.2@2976.38,397.65 ; 3322.64,321.39 3130.59,321.39 3089.1,362.89 3011.13,362.89 D3.2@2976.38,397.65
DTR_CH340: IC2.13 Q2.2 R20.2 | length 871
  Top Layer w10: IC2.13 2417.49,568.11 2433.9,551.71 2642.26,551.71 2690.94,600.39 2690.94,631.89 2770.67,711.61 Q2.2
EN_PA: HD1.6 U1.9 | length 1486.9
  Top Layer w10: v2@1409.64,954.76 U1.9@1466.46,954.76
  Top Layer w11.81: HD1.6 1332.32,1084.88 v2(1409.37,1007.83)
  Bottom Layer w10: v2(1409.37,1007.83) 1409.41,1007.79 v2(1409.45,954.94) v2(1409.45,954.94)
GND: ANT1.2 C1.1 C2.1 C3.1 C4.1 C5.1 C6.1 C7.1 C8.2 C9.2 C12.1 C13.1 C14.1 C15.1 C16.2 C17.1 C18.1 C19.1 C20.1 C21.1 C22.2 D1.1 D2.1 D3.1 HD1.1 HD1.2 HD1.3 HD2.7 HD2.8 IC1.4 IC2.1 J1.G1 J1.G2 J1.G3 J1.G4 J2.A1B12 J2.B1A12 J2.S1 J2.S2 J2.S3 J2.S4 J5.4 POWER.2 R18.1 R19.1 SW1.3 SW1.4 SW2.3 SW2.4 U1.33 VR1.1 | length 1630.1
  Top Layer w10: IC1.4 v1(1722.24,236.42) v1@1722.44,236.22
  Top Layer w43.31: v4(1726.93,1013.22) 1926.18,1212.47 1926.18,1292.54 1951.55,1317.91 2144.02,1317.91 2196.85,1265.08 C15.1 2203.74,1263.11 2240.38,1263.11 2265.75,1237.75 2265.75,942.53 2240.38,917.17 2203.74,917.17 C14.1 2196.85,915.2 2152.72,871.06 v4(1770.64,871.06)
  other v1: 165.35,62.99 244.09,62.99 322.84,62.99 401.58,62.99 480.32,62.99 559.06,62.99 637.8,62.99 716.54,62.99 795.28,62.99 874.02,62.99 3314.96,62.99 3393.7,62.99 3472.44,62.99 3551.18,62.99 165.35,141.73 244.09,141.73 322.84,141.73 401.58,141.73 1031.5,141.73 1110.24,141.73 2212.6,141.73 2291.34,141.73 2370.08,141.73 2448.82,141.73 2606.3,141.73 2763.78,141.73 2842.52,141.73 3078.74,141.73 3472.44,141.73 165.35,220.47 244.09,220.47 322.84,220.47 401.58,220.47 480.32,220.47 559.06,220.47 637.8,220.47 795.28,220.47 874.02,220.47 1346.46,220.47 1818.9,220.47 2055.12,220.47 2133.86,220.47 2527.56,220.47 2606.3,220.47 2685.04,220.47 2842.52,220.47 2921.26,220.47 3000,220.47 3078.74,220.47 3472.44,220.47 3551.18,220.47 165.35,299.21 244.09,299.21 322.84,299.21 401.58,299.21 480.32,299.21 559.06,299.21 637.8,299.21 795.28,299.21 874.02,299.21 1188.98,299.21 1346.46,299.21 1425.2,299.21 1740.16,299.21 1818.9,299.21 2055.12,299.21 2133.86,299.21 2212.6,299.21 2291.34,299.21 2527.56,299.21 2685.04,299.21 3472.44,299.21 3551.18,299.21 244.09,377.95 322.84,377.95 401.58,377.95 480.32,377.95 559.06,377.95 637.8,377.95 716.54,377.95 1110.24,377.95 1188.98,377.95 1346.46,377.95 1425.2,377.95 1818.9,377.95 2212.6,377.95 2685.04,377.95 3472.44,377.95 3551.18,377.95 322.84,456.69 401.58,456.69 480.32,456.69 559.06,456.69 637.8,456.69 716.54,456.69 1503.94,456.69 2055.12,456.69 2291.34,456.69 2448.82,456.69 2685.04,456.69 2842.52,456.69 3078.74,456.69 3472.44,456.69 401.58,535.43 480.32,535.43 559.06,535.43 637.8,535.43 1976.38,535.43 2685.04,535.43 2763.78,535.43 2842.52,535.43 3472.44,535.43 480.32,614.17 559.06,614.17 874.02,614.17 1110.24,614.17 1188.98,614.17 1267.72,614.17 2212.6,614.17 2291.34,614.17 2448.82,614.17 2527.56,614.17 3157.48,614.17 3314.96,614.17 3551.18,614.17 795.28,692.91 874.02,692.91 952.76,692.91 1188.98,692.91 1267.72,692.91 1346.46,692.91 2291.34,692.91 3000,692.91 3157.48,692.91 3314.96,692.91 3393.7,692.91 3472.44,692.91 3551.18,692.91 716.54,771.65 795.28,771.65 874.02,771.65 952.76,771.65 1031.5,771.65 1897.64,771.65 2055.12,771.65 2133.86,771.65 2212.6,771.65 2291.34,771.65 2370.08,771.65 2606.3,771.65 2685.04,771.65 3314.96,771.65 3551.18,771.65 1513.78,835.63 1611.22,835.63 1562.99,836.61 165.35,850.39 401.58,850.39 2212.6,850.39 2291.34,850.39 2370.08,850.39 2448.82,850.39 2842.52,850.39 3157.48,850.39 3236.22,850.39 3314.96,850.39 3551.18,850.39 1562.91,885.67 1611.22,885.83 1513.78,886.81 165.35,929.14 2606.3,929.14 3472.44,929.14 1562.99,933.07 1612.2,933.07 1513.78,934.06 1661.42,1007.88 2448.82,1007.88 2606.3,1007.88 3000,1007.88 3157.48,1007.88 3236.22,1007.88 3314.96,1007.88 3472.44,1007.88 3551.18,1007.88 1661.42,1086.62 2448.82,1086.62 2842.52,1086.62 3000,1086.62 3157.48,1086.62 3236.22,1086.62 3314.96,1086.62 3472.44,1086.62 3551.18,1086.62 1425.2,1165.36 1740.16,1165.36 3236.22,1165.36 3314.96,1165.36 3472.44,1165.36 165.35,1244.1 244.09,1244.1 322.84,1244.1 401.58,1244.1 480.32,1244.1 559.06,1244.1 637.8,1244.1 716.54,1244.1 795.28,1244.1 874.02,1244.1 952.76,1244.1 1031.5,1244.1 1110.24,1244.1 1425.2,1244.1 2606.3,1244.1 2685.04,1244.1 2763.78,1244.1 2842.52,1244.1 3000,1244.1 3157.48,1244.1 3314.96,1244.1 3472.44,1244.1 165.35,1322.84 244.09,1322.84 322.84,1322.84 401.58,1322.84 480.32,1322.84 559.06,1322.84 637.8,1322.84 716.54,1322.84 795.28,1322.84 874.02,1322.84 952.76,1322.84 1031.5,1322.84 1110.24,1322.84 1188.98,1322.84 1267.72,1322.84 1346.46,1322.84 1425.2,1322.84 1503.94,1322.84 2212.6,1322.84 2291.34,1322.84 2527.56,1322.84 2606.3,1322.84 2763.78,1322.84 3000,1322.84 3157.48,1322.84 3236.22,1322.84 3393.7,1322.84 3472.44,1322.84 3551.18,1322.84 165.35,1401.58 244.09,1401.58 322.84,1401.58 401.58,1401.58 480.32,1401.58 559.06,1401.58 637.8,1401.58 716.54,1401.58 795.28,1401.58 874.02,1401.58 952.76,1401.58 1031.5,1401.58 1110.24,1401.58 1188.98,1401.58 1267.72,1401.58 1346.46,1401.58 1425.2,1401.58 1503.94,1401.58 1582.68,1401.58 1661.42,1401.58 1740.16,1401.58 1818.9,1401.58 1897.64,1401.58 2448.82,1401.58 2527.56,1401.58 2606.3,1401.58 3000,1401.58 3314.96,1401.58 3472.44,1401.58 165.35,1480.32 244.09,1480.32 322.84,1480.32 401.58,1480.32 480.32,1480.32 559.06,1480.32 637.8,1480.32 716.54,1480.32 795.28,1480.32 874.02,1480.32 952.76,1480.32 1031.5,1480.32 1582.68,1480.32 1897.64,1480.32 1976.38,1480.32 2055.12,1480.32 2133.86,1480.32 2212.6,1480.32 2291.34,1480.32 2370.08,1480.32 2448.82,1480.32 2527.56,1480.32 2606.3,1480.32 2685.04,1480.32 2763.78,1480.32 2842.52,1480.32 3000,1480.32 3314.96,1480.32 3472.44,1480.32 165.35,1559.06 244.09,1559.06 322.84,1559.06 401.58,1559.06 480.32,1559.06 559.06,1559.06 637.8,1559.06 716.54,1559.06 795.28,1559.06 874.02,1559.06 952.76,1559.06 1110.24,1559.06 1188.98,1559.06 1267.72,1559.06 1346.46,1559.06 1425.2,1559.06 1503.94,1559.06 1582.68,1559.06 1661.42,1559.06 1897.64,1559.06 1976.38,1559.06 2055.12,1559.06 2133.86,1559.06 2212.6,1559.06 2291.34,1559.06 2370.08,1559.06 2448.82,1559.06 2527.56,1559.06 2606.3,1559.06 2685.04,1559.06 2763.78,1559.06 3000,1559.06 3157.48,1559.06 3236.22,1559.06 3314.96,1559.06 3472.44,1559.06 3551.18,1559.06 165.35,1637.8 244.09,1637.8 401.58,1637.8 637.8,1637.8 716.54,1637.8 795.28,1637.8 874.02,1637.8 1031.5,1637.8 1110.24,1637.8 1188.98,1637.8 1267.72,1637.8 1346.46,1637.8 1425.2,1637.8 1503.94,1637.8 1582.68,1637.8 1661.42,1637.8 1818.9,1637.8 1897.64,1637.8 1976.38,1637.8 2055.12,1637.8 2133.86,1637.8 2212.6,1637.8 2291.34,1637.8 2370.08,1637.8 2448.82,1637.8 2527.56,1637.8 2763.78,1637.8 3157.48,1637.8 3236.22,1637.8 3314.96,1637.8 3472.44,1637.8 3551.18,1637.8 86.61,1716.54 165.35,1716.54 244.09,1716.54 952.76,1716.54 1031.5,1716.54 1110.24,1716.54 1188.98,1716.54 1267.72,1716.54 1346.46,1716.54 1425.2,1716.54 1503.94,1716.54 1661.42,1716.54 2055.12,1716.54 2133.86,1716.54 2212.6,1716.54 2291.34,1716.54 2370.08,1716.54 2448.82,1716.54 2527.56,1716.54 2606.3,1716.54 2763.78,1716.54 3000,1716.54 3157.48,1716.54 3236.22,1716.54 3314.96,1716.54 3472.44,1716.54 86.61,1795.28 165.35,1795.28 244.09,1795.28 637.8,1795.28 716.54,1795.28 795.28,1795.28 874.02,1795.28 952.76,1795.28 1031.5,1795.28 1110.24,1795.28 1188.98,1795.28 1267.72,1795.28 1346.46,1795.28 1425.2,1795.28 1503.94,1795.28 1897.64,1795.28 2055.12,1795.28 2133.86,1795.28 2212.6,1795.28 2291.34,1795.28 2370.08,1795.28 2448.82,1795.28 2527.56,1795.28 2606.3,1795.28 2685.04,1795.28 2763.78,1795.28 3000,1795.28 3157.48,1795.28 3236.22,1795.28 3314.96,1795.28 3472.44,1795.28 86.61,1874.02 165.35,1874.02 244.09,1874.02 401.58,1874.02 637.8,1874.02 716.54,1874.02 795.28,1874.02 874.02,1874.02 952.76,1874.02 1031.5,1874.02 1110.24,1874.02 1188.98,1874.02 1267.72,1874.02 1346.46,1874.02 1425.2,1874.02 1503.94,1874.02 1582.68,1874.02 1661.42,1874.02 1740.16,1874.02 1818.9,1874.02 1897.64,1874.02 1976.38,1874.02 2055.12,1874.02 2133.86,1874.02 2212.6,1874.02 2291.34,1874.02 2370.08,1874.02 2448.82,1874.02 2527.56,1874.02 2606.3,1874.02 2685.04,1874.02 2763.78,1874.02 2842.52,1874.02 2921.26,1874.02 3000,1874.02 3078.74,1874.02 3157.48,1874.02 3236.22,1874.02 3314.96,1874.02 3393.7,1874.02 3472.44,1874.02 3551.18,1874.02
GPIO2: HD1.4 U1.6 | length 1613.6
  Top Layer w10: HD1.4 1223.71,1284.88 v2(1493.83,1014.76) ; U1.6 1533.48,982.02 1533.48,1013.61 v2(1533.57,1013.7)
  Bottom Layer w10: v2(1493.83,1014.76) 1494.36,1014.23 1533.04,1014.23 v2(1533.57,1013.7)
GPIO5: HD2.2 U1.10 | length 1522.6
  Top Layer w10: HD2.2 340.54,935.07 1466.46,935.07 U1.10
GPIO6: HD2.3 U1.12 | length 1547.6
  Top Layer w10: HD2.3 400.8,895.32 1417.68,895.32 1417.87,895.51 U1.12
GPIO7: HD2.4 U1.13 | length 1580.8
  Top Layer w10: HD2.4 481.3,875.83 U1.13
GPIO8: HD2.5 U1.14 | length 1614.1
  Top Layer w10: HD2.5 561.61,856.14 U1.14
GPIO9: HD2.6 U1.15 | length 1647.4
  Top Layer w10: HD2.6 641.93,836.46 U1.15
GPIO_DHT: HD1.5 J5.2 R23.1 U1.16 | length 2819.9
  Top Layer w10: HD1.5 1264.92,1184.88 v2(1436.02,1013.78) ; J5.2 703.15,315.35 911.32,523.52 911.32,555.02 1172.88,816.58 v2(1434.06,816.58) 1434.06,816.77 U1.16
  Bottom Layer w10: v2(1434.06,816.58) 1434.06,818.14 1436.02,820.11 v2(1436.02,1013.78)
GPIO_WU: HD1.7 U1.8 | length 1432.6
  Top Layer w10: HD1.7 1493.7,984.88 1494.02,984.57 U1.8
NetANT1_1: ANT1.1 C13.2 L2.2 | length 540.8
  Top Layer w10: ANT1.1@1313.78,2027.2 1313.78,2109.76 1318.62,2114.61 ANT1.1@1357.09,2114.61 ; C13.2 1573.72,1795.14 1767.7,1795.14 L2.2 1770.47,1798.15 ANT1.1@1770.47,2008.31
NetC5_2: C5.2 L1.1 U1.2 U1.3 | length 497.4
  Top Layer w10: U1.3 U1.2 ; U1.2@1612.22,982.12 v2@1612.22,1013.61
  Bottom Layer w10: v2(1612.22,1013.8) 1612.22,969.51 1677.17,904.57 L1.1 C5.2
NetC10_1: C10.1 C11.1 | length 116.1
  Top Layer w10: C10.1 C11.1
NetC10_2: C10.2 C11.2 IC1.8 U1.18 | length 1033.4
  Top Layer w10: C10.2 C11.2 ; IC1.8 1435.63,86.42 1256.89,265.16 C11.2 ; U1.18 1513.7,743.57 1343.31,573.18 1343.31,504.73 1268.7,430.12 C11.2
NetC12_2: C12.2 L2.1 R3.2 | length 325.6
  Top Layer w10: R3.2 L2.1 1969.45,1718.15 C12.2
NetC14_2: C14.2 R8.2 Y1.2 | length 370.4
  Top Layer w10: R8.2 1975.39,934.06 Y1.2 2199.92,997.05 C14.2
NetC15_2: C15.2 U1.29 Y1.1 | length 708.1
  Top Layer w10: U1.29 1733.11,895.51 1828.74,991.14 1910.43,991.14 2038.39,1119.09 Y1.1 2196.89,1189.96 C15.2
NetIC1_1: IC1.1 U1.21 | length 750.8
  Top Layer w10: U1.21 1572.76,602.66 1606.49,568.92 1606.49,394.45 1591.8,379.76 1591.8,378.43 1589.7,376.33 1589.7,262.51 1587.6,260.41 1587.6,129.33 1630.51,86.42 IC1.1@1638.78,86.42
NetIC1_2: IC1.2 R6.1 | length 371.8
  Top Layer w10: IC1.2 1684.45,136.42 1786.42,238.39 R6.1
NetIC1_3: IC1.3 R10.1 | length 453.2
  Top Layer w10: R10.1 1645.67,408.26 1606.7,369.29 1606.7,210.23 1630.51,186.42 IC1.3
NetIC1_5: IC1.5 R4.1 | length 140.2
  Top Layer w10: IC1.5 1489.57,236.42 1530.51,277.36 R4.1@1530.51,332.68
NetIC1_6: IC1.6 R7.1 | length 326.6
  Top Layer w10: IC1.6 1489.57,186.42 1572.7,269.55 1572.7,448.68 R7.1
NetIC1_7: IC1.7 R9.1 | length 337.3
  Top Layer w10: R9.1 1390.75,181.3 1435.63,136.42 IC1.7
NetJ1_1: J1.1 R2.2 | length 1216.7
  Top Layer w10: J1.1 466.04,1717.06 880.66,1717.06 1115.59,1482.13 R2.2
Netj2_A5: J2.A5 R19.2 | length 187
  Top Layer w11.81: R19.2 3200.79,242.13 3234.4,275.74 3259.84,275.74 ; 3259.84,276.46 J2.A5
Netj2_B5: J2.B5 R18.2 | length 163.6
  Top Layer w11.81: R18.2@3204.72,419.29 3229.45,394.57 J2.B5
NetLED1_1: POWER.1 R1.1 | length 225.4
  Top Layer w20: POWER.1 2401.57,929.13 2413.39,917.32 R1.1
NetQ1_1: Q1.1 R20.1 | length 518
  Top Layer w10: Q1.1 2500,708.66 2576.77,631.89 R20.1
NetQ2_1: Q2.1 R21.1 | length 237.7
  Top Layer w10: R21.1 2692.91,866.14 2692.91,1095.47 Q2.1
NetR2_1: R2.1 R3.1 U1.1 | length 635.6
  Top Layer w10: U1.1 1632.13,982.24 1632.13,1476.46 R2.1 R3.1
NetR4_2: R4.2 U1.23 | length 552.2
  Top Layer w10: U1.23 1612.13,713.4 1726.38,599.15 1726.38,384.84 1674.21,332.68 R4.2
NetR5_1: R5.1 U1.4 | length 214.9
  Top Layer w10: U1.4 R5.1
NetR6_2: R6.2 U1.24 | length 300.3
  Top Layer w10: U1.24 1631.81,754.02 1786.42,599.41 R6.2
NetR7_2: R7.2 U1.22 | length 378.6
  Top Layer w10: U1.22 1592.44,709.05 1688.98,612.51 R7.2
NetR8_1: R8.1 U1.30 | length 254.2
  Top Layer w10: U1.30 1709.49,915.2 1842.52,1048.23 R8.1
NetR9_2: R9.2 U1.19 | length 306.2
  Top Layer w10: R9.2 1390.75,596.57 1533.39,739.21 U1.19
NetR10_2: R10.2 U1.20 | length 211.7
  Top Layer w10: R10.2 1531.5,602.36 1553.07,623.94 U1.20
NetR13_1: R13.1 U1.27 | length 439.9
  Top Layer w10: U1.27 1710.79,856.14 1718.5,848.43 1718.5,745.64 1819.73,644.42 1887.08,644.42 1921.26,610.24 R13.1
NetR14_1: R14.1 U1.28 | length 443.5
  Top Layer w10: U1.28 1722.4,875.89 1739.17,859.12 1739.17,752.95 1830.71,661.42 1885.83,661.42 1921.26,696.85 R14.1
NetR15_1: R15.1 U1.7 | length 373.2
  Top Layer w10: U1.7 1513.7,1255.91 1572.76,1314.96 R15.1
RTS_CH340: IC2.14 Q1.2 R21.2 | length 792.8
  Top Layer w10: IC2.14 2391.54,618.11 2440.94,568.71 2598.54,568.71 2608.46,578.62 2608.46,689.35 2575.79,722.02 R21.2 2575.3,863.68 2575.3,1101.87 Q1.2
RXD_CH340: IC2.3 R13.2 | length 158.1
  Top Layer w10: R13.2 2050.12,609.17 2050.12,626.75 2055.98,632.61 2075.64,632.61 2134.47,632.61 2148.97,618.11 IC2.3
TXD_CH340: IC2.2 R14.2 | length 185.6
  Top Layer w15: R14.2 2035.94,712.09 2035.94,668.02 2054.35,649.61 2129.33,649.61 2147.83,668.11 IC2.2
pads on no net: IC2.7 IC2.8 IC2.9 IC2.10 IC2.11 IC2.12 IC2.15 J2. J2.A8 J2.B8 J5.3 U1.5 U1.25 U1.26 VR1.4

## Polygon pours and split planes (outlines as drawn)
GND on Bottom Layer "NONET_L-01_P-001" (solid, pour order 0): -0.01,1931.41 -0.01,0.07 3645.65,0.07 3645.65,1931.42
GND on Top Layer "NONET_L-01_P-001" (solid, pour order 1): -0.01,1931.41 -0.01,0.07 3645.65,0.07 3645.65,1931.42

## Other copper
Top Layer:
  pour cut-out: 1732.32,1831.97 1732.32,1684.33 1809.09,1684.33 1809.09,1831.97
  pour cut-out: 1723.23,860.47 1695.82,1007.03 1926.18,1234.22 1937.01,1303.37 2144.02,1317.91 2203.74,1263.11 2240.16,1263.11 2265.75,1231.12 2265.75,942.53 2230.32,902.99 2193.56,911.91 2151.75,862.97 1724.86,861.93
  region: 1835.41,2100.54 1870.78,2100.54 1870.78,2116.68 1835.49,2116.68
  region net NetANT1_1: 1605.4,2020.36 1605.4,2000.89 1582.38,2000.89 1582.38,2020.37
  region net NetANT1_1: 1499.31,2020.31 1499.31,2000.85 1476.29,2000.85 1476.29,2020.32
  region net NetANT1_1: 1420.36,2020.36 1420.36,2000.89 1397.34,2000.89 1397.34,2020.37
  region net NetANT1_1: 1684.35,2020.36 1684.35,2000.89 1661.33,2000.89 1661.33,2020.37
  region net NetANT1_1: 1780.16,2090.47 1760.7,2090.47 1760.7,2113.49 1780.17,2113.49
  region net NetANT1_1: 1693.55,2100.74 1674.08,2100.74 1674.08,2123.76 1693.56,2123.76
  region net NetANT1_1: 1595.12,2100.74 1575.66,2100.74 1575.66,2123.76 1595.13,2123.76
  region net NetANT1_1: 1508.51,2099.49 1489.04,2099.49 1489.04,2122.52 1508.52,2122.52
  region net NetANT1_1: 1410.08,2100.74 1390.62,2100.74 1390.62,2123.76 1410.09,2123.76
  region net NetANT1_1: 1323.47,2099.49 1304.01,2099.49 1304.01,2122.52 1323.48,2122.52
Bottom Layer:
  pour cut-out: 1643.35,758.86 1643.35,682.09 1790.98,682.09 1790.98,758.86

## Silkscreen, mask and mechanical layers (free items; w line width, h text height)
Top Overlay:
  text "GND" at 159.66,1546.24 h60
  text "GND" at 159.66,1446.24 h60
  text "GND" at 159.66,1346.24 h60
  text "GPIO2" at 159.66,1246.24 h60
  text "GPIO_DHT" at 159.66,1156.24 h60
  text "EN_PA" at 159.66,1056.24 h60
  text "GPIO_WU" at 159.66,956.24 h60
  text "3V3_CONNECT" at 155.72,726.12 h60
  text "GPIO5" at 155.72,616.12 h60
  text "GPIO6" at 155.72,516.12 h60
  text "GPIO7" at 155.72,416.12 h60
  text "GPIO8" at 155.72,316.12 h60
  text "CONNECT" at 1055.98,246.09 h40
  text "GPIO9" at 155.72,216.12 h60
  text "VBUS" at 2407.65,168.64 h40 r270
  text "5V" at 2299.63,164.49 h40 r270
  text "3V3" at 1055.98,146.09 h40
  text "GND" at 155.72,116.12 h60
  text "CONNECT" at 1985.22,116.05 h40
  text "LDO" at 1055.98,46.09 h40
  text "GND" at 155.72,16.12 h60
Mechanical 1:
  pour cut-out: 1643.35,758.86 1643.35,682.09 1790.98,682.09 1790.98,758.86

## Text inside footprints (layer, text, board x,y; h text height)
HD1: Mechanical 2 "8" at 48.43,896.3 h47.24 r270; Mechanical 2 "1" at 48.43,1593.15 h47.24 r270
HD2: Mechanical 2 "8" at 44.49,66.18 h47.24 r270; Mechanical 2 "1" at 44.49,763.03 h47.24 r270
J3: Mechanical 2 "1" at 2432.83,254.09 h47.24 r180; Mechanical 2 "3" at 2232.83,254.09 h47.24 r180
J4: Mechanical 2 "1" at 966.38,279.29 h47.24 r270; Mechanical 2 "3" at 966.38,79.29 h47.24 r270